# Allegro board st-link-v2_pro_opt.brd
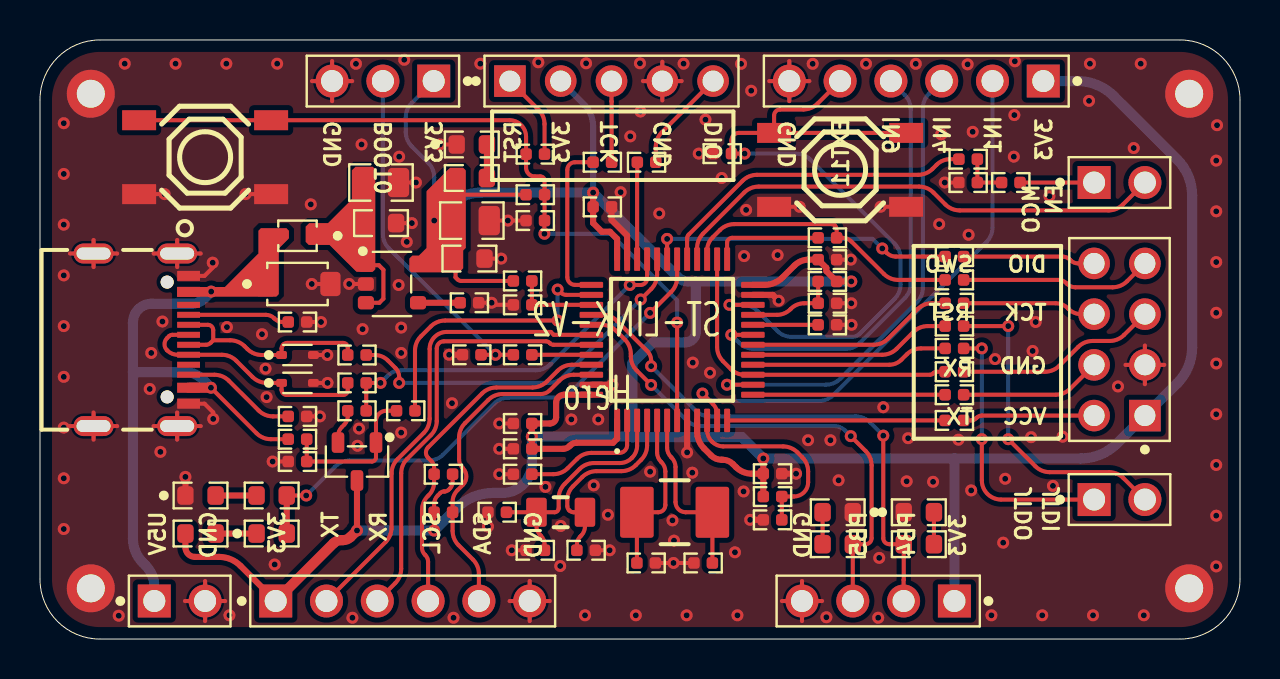
[diagram p0: board, top side]
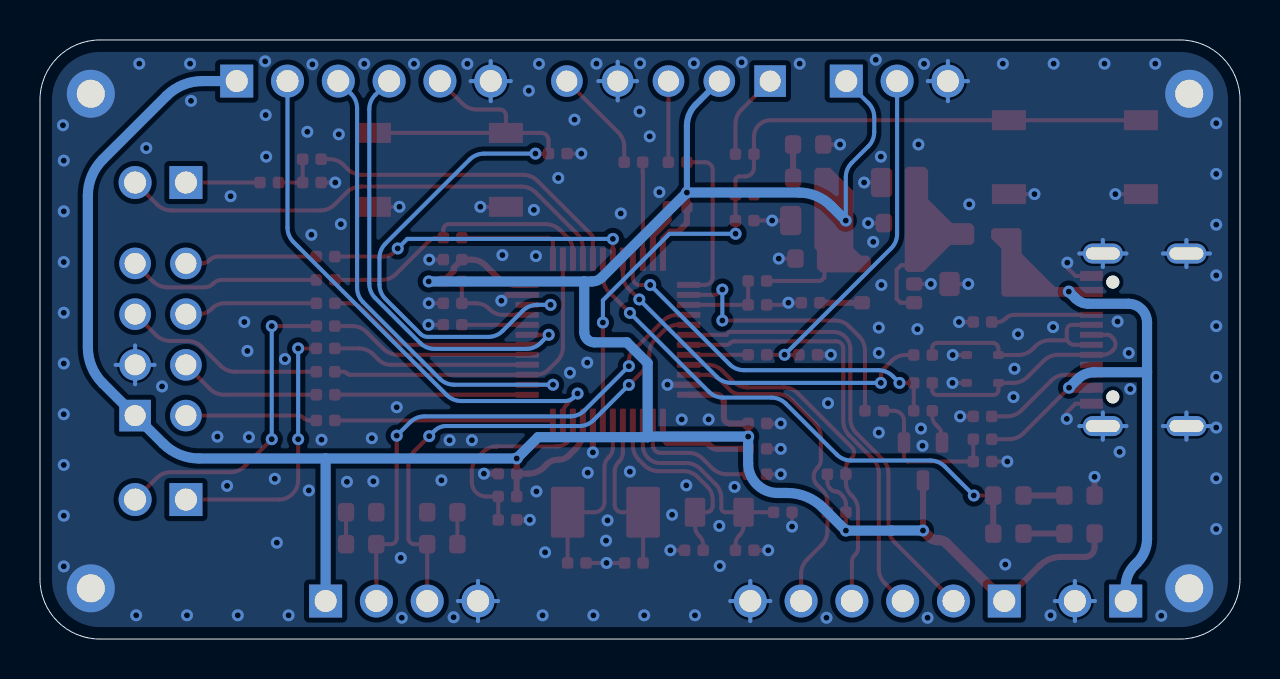
[diagram p1: board, bottom side, seen from below]

Outline 60 x 30 mm; copper layers: TOP, BOTTOM. Coordinates in mm from the lower left corner of the outline.
Outline path: 0,27 0,3 arc(0.88,0.88) 3,0 57,0 arc(59.12,0.88) 60,3 60,27 arc(59.12,29.12) 57,30 3,30 arc(0.88,29.12) 0,27

## Design rules (mm)
constraint set DEFAULT: min track width 0.127

## Placement (name value [footprint] x y rotation side)
C1  20pF,50V  [CAPC100X50X55L25N]  30.31 3.81 180 top
C2  10uF,25V  [CAPC200X125X145L45N]  17.05 22.86 0 top
C3  1uF,25V  [CAPC160X80X90L30N]  17.05 20.83 0 top
C4  10uF,25V  [CAPC200X125X145L45N]  21.59 20.95 0 top
C5  1uF,25V  [CAPC160X80X90L30N]  21.47 19.05 0 top
C6  20pF,50V  [CAPC100X50X55L25N]  33.16 3.81 0 top
C7  1nF,50V(NC)  [CAPC100X50X55L25N]  21.47 16.84 0 top
C8  100nF,25V  [CAPC100X50X55L25N]  24.77 20.95 180 top
C9  20pF,50V  [CAPC100X50X55L25N]  24.77 4.45 0 top
C10  20pF,50V  [CAPC100X50X55L25N]  27.3 4.45 180 top
C11  20pF,50V  [CAPC100X50X55L25N]  46.41 22.86 0 top
C12  100nF,25V  [CAPC100X50X55L25N]  39.37 19 0 top
C13  100nF,25V  [CAPC100X50X55L25N]  36.63 8.28 0 top
C14  100nF,25V  [CAPC100X50X55L25N]  24.13 9.53 180 top
C15  100nF,25V  [CAPC100X50X55L25N]  24.13 10.79 180 top
C16  100nF,25V  [CAPC100X50X55L25N]  28.12 21.64 0 top
C17  100nF,25V  [CAPC100X50X55L25N]  34.11 24.31 180 top
D1  1N4007WS  [SOD265X130X110L32X32N]  12.87 20.19 180 top
D2  SMF5.0A  [SODFL370X180X135L60_50X100N]  12.87 17.78 0 top
D3  TVSS5VCES-02GP-J  [SODFL160X80X70L20X30N]  12.87 14.22 0 top
D4  TVSS5VCES-02GP-J  [SODFL160X80X70L20X30N]  12.87 12.83 0 top
D5  Red_LED  [LEDC160X80X70L30N]  21.59 24.77 0 top
D6  Red_LED  [LEDC160X80X70L30N]  43.94 6.35 0 top
D7  Green_LED  [LEDC160X80X70L30N]  39.89 6.35 180 top
D8  Red_LED  [LEDC160X80X70L30N]  8.03 7.19 0 top
D9  Green_LED  [LEDC160X80X70L30N]  8.03 5.28 180 top
J1  TYPE-C-16P  [USB-C-SMD-16P]  6.86 14.98 270 top
J2  4x2.54P  [HEADER_3X1_2P54]  19.68 27.94 180 top
J3  2x2.54P  [HEADER_2X1_2P54]  5.71 1.91 0 top
J4  5x2.54P  [HDRV5W64P254_5X1_1270X254H860]  23.5 27.94 0 top
J5  6x2.54P  [HEADER_6X1_2P54]  11.79 1.91 0 top
J6  4x2.54P  [HEADER_4X1_2P54]  45.72 1.91 180 top
J7  6x2.54P  [HEADER_6X1_2P54]  50.16 27.94 180 top
J8  P2.54x4x2  [HDRV8W64P254_4X2_1016X502H838]  55.24 11.19 90 top
J9  2x2.54P  [HEADER_2X1_2P54]  52.7 6.99 0 top
J10  2x2.54P  [HEADER_2X1_2P54]  52.7 22.86 0 top
Q1  SS8050  [SOT23-3P95_240X110L53X44N]  15.85 8.89 180 top
R1  100k,5%  [RESC100X50X40L25N]  24.13 14.23 0 top
R2  100k,5%  [RESC100X50X40L25N]  24.77 22.25 0 top
R3  0R,5%  [RESC100X50X40L25N]  39.37 15.74 180 top
R4  5.1k,5%  [RESC100X50X40L25N]  12.87 15.88 180 top
R5  5.1k,5%  [RESC100X50X40L25N]  12.87 11.15 180 top
R6  1k,5%  [RESC160X80X55L30N]  21.59 23.09 0 top
R7  10k,5%  [RESC100X50X40L25N]  12.87 10.01 0 top
R8  0R,5%  [RESC100X50X40L25N]  15.85 14.22 0 top
R9  100R,5%  [RESC100X50X40L25N]  18.29 11.43 0 top
R10  10k,5%(NC)  [RESC100X50X40L25N]  22.86 6.35 0 top
R11  0R,5%  [RESC100X50X40L25N]  15.85 12.83 0 top
R12  36k,5%  [RESC100X50X40L25N]  12.87 8.89 180 top
R13  10k,5%  [RESC100X50X40L25N]  24.13 8.26 0 top
R14  1.5k,5%  [RESC100X50X40L25N]  15.85 11.43 180 top
R15  100R,5%  [RESC100X50X40L25N]  46.41 24.03 0 top
R16  0R,5%  [RESC100X50X40L25N]  48.54 22.86 0 top
R17  0R,5%  [RESC100X50X40L25N]  24.77 24.28 180 top
R18  0R,5%  [RESC100X50X40L25N]  28.12 23.88 180 top
R19  0R,5%  [RESC100X50X40L25N]  30.33 23.88 180 top
R20  100R,5%  [RESC100X50X40L25N]  39.37 20.09 0 top
R21  4.7k,5%  [RESC100X50X40L25N]  36.63 7.14 0 top
R22  4.7k,5%  [RESC100X50X40L25N]  24.13 17.93 0 top
R23  0R,5%(NC)  [RESC100X50X40L25N]  39.37 17.91 180 top
R24  4.7k,5%  [RESC100X50X40L25N]  36.63 5.97 180 top
R25  4.7k,5%(NC)  [RESC100X50X40L25N]  24.13 16.74 180 top
R26  0R,5%(NC)  [RESC100X50X40L25N]  39.37 16.81 0 top
R27  1k,5%  [RESC160X80X55L30N]  43.94 4.75 0 top
R28  1k,5%  [RESC160X80X55L30N]  39.89 4.75 180 top
R30  1k,5%  [RESC160X80X55L30N]  11.58 7.19 180 top
R31  0R,5%  [RESC100X50X40L25N]  45.72 17.98 180 top
R32  0R,5%  [RESC100X50X40L25N]  45.72 19.15 0 top
R33  0R,5%  [RESC100X50X40L25N]  45.72 16.81 0 top
R34  0R,5%  [RESC100X50X40L25N]  45.72 13.39 180 top
R35  0R,5%  [RESC100X50X40L25N]  45.72 14.55 0 top
R36  1k,5%  [RESC160X80X55L30N]  11.58 5.28 180 top
R37  0R,5%  [RESC100X50X40L25N]  45.72 12.23 0 top
R38  0R,5%  [RESC100X50X40L25N]  45.72 15.67 0 top
R39  0R,5%  [RESC100X50X40L25N]  45.72 10.95 0 top
R40  0R,5%  [RESC100X50X40L25N]  21.59 14.23 0 top
R41  4.7k,5%(NC)  [RESC100X50X40L25N]  20.17 8.26 180 top
R42  4.7k,5%(NC)  [RESC100X50X40L25N]  20.17 6.35 0 top
SH1  Screw_Hole_M1.2  [MTGP240H140]  2.54 2.54 0 top
SH2  Screw_Hole_M1.2  [MTGP240H140]  57.46 2.54 0 top
SH3  Screw_Hole_M1.2  [MTGP240H140]  57.46 27.3 0 top
SH4  Screw_Hole_M1.2  [MTGP240H140]  2.54 27.3 0 top
SW1  TS-1187A-B-A-B  [SW_SMD_4P_5D1X5D1]  8.26 24.13 180 top
SW2  TS-1187A-B-A-B  [SW_SMD_4P_5D1X5D1]  40.01 23.5 180 top
U1  RT9013-33GB  [SOT23-5]  17.6 17.78 270 top
U2  STM32F103CBT6  [QFP50P900X900X145-48N]  31.61 14.98 90 top
Y1  8MHz,10pF  [SMD5032-2P]  31.73 6.35 180 top
Y2  32.768kHz,12.5pF  [SMD3215-2P]  26.04 6.35 180 top

## Library data of the parts
C1 C6 C9-C11 = CAP_20pF_50V_NP0_0402
C2 C4 = CAP_10uF_25V_X5R_0805
C3 C5 = CAP_1uF_25V_X7R_0603
C7 = CAP_1nF_50V_X7R_0402
C8 C12-C17 = CAP_100nF_25V_X5R_0402
D1 = DIODE_1N4007WS_50V_1A_SOD-323
D2 = TVS_S_SMF5.0A_5V_SOD-123FL
D3 D4 = ESD_B_TVSS5VCES_5V_SOD-523
D5 D6 D8 = LED_Red_0603
D7 D9 = LED_Green_0603
J1 = HC-TYPE-C-16P-01A-O
J2 = HEADER_3X1_2.54P
J3 J9 J10 = HEADER_2X1_2.54P
J4 = HEADER_5X1_2.54P
J5 J7 = HEADER_6X1_2.54P
J6 = HEADER_4X1_2.54P
J8 = HEADER_V_4X2_2.54P
Q1 = TR_NPN_SS8050_25V_1.5A_SOT-23
R1 R2 = RES_100k_5%_0402
R3 R8 R11 R16-R19 R23 R26 R31-R35 R37-R40 = RES_0R_5%_0402
R4 R5 = RES_5.1k_5%_0402
R6 R27 R28 R30 R36 = RES_1k_5%_0603
R7 R10 R13 = RES_10k_5%_0402
R9 R15 R20 = RES_100R_5%_0402
R12 = RES_36k_5%_0402
R14 = RES_1.5k_5%_0402
R21 R22 R24 R25 R41 R42 = RES_4.7k_5%_0402
SH1-SH4 = Screw_Hole_M1.2
SW1 SW2 = SW_ PUSHBUTTON_4P_2V2: Tolerance: .TOL; User Part Number: .PARTNO
U1 = RT9013-33GB
U2 = STM32F103CBT6
Y1 = 8MHz_20pF_SMD5032-2P
Y2 = 32.768KHz_12.5pF_SMD3215-2P

## Footprints (pads in the part's own frame, mm; a bottom-side part is the same pattern mirrored in y, then rotated)
CAPC100X50X55L25N
  rrect 0.575x0.58 smd: 1(-0.462,0) 2(0.462,0)
CAPC160X80X90L30N
  rrect 0.82x0.929 smd: 1(-0.755,0) 2(0.755,0)
CAPC200X125X145L45N
  rrect 1.065x1.465 smd: 1(-0.875,0) 2(0.875,0)
HDRV5W64P254_5X1_1270X254H860
  rect 1.58x1.58 hole 1.05: 1(0,0)
  round 1.58 hole 1.05: 2(2.54,0) 3(5.08,0) 4(7.62,0) 5(10.16,0)
HDRV8W64P254_4X2_1016X502H838
  rect 1.58x1.58 hole 1.05: 1(0,0)
  round 1.58 hole 1.05: 2(0,2.54) 3(2.54,0) 4(2.54,2.54) 5(5.08,0) 6(5.08,2.54) 7(7.62,0) 8(7.62,2.54)
HEADER_2X1_2P54
  rect 1.65x1.65 hole 1.1: 1(0,0)
  round 1.65 hole 1.1: 2(2.54,0)
HEADER_3X1_2P54
  rect 1.65x1.65 hole 1.1: 1(0,0)
  round 1.65 hole 1.1: 2(2.54,0) 3(5.08,0)
HEADER_4X1_2P54
  rect 1.65x1.65 hole 1.1: 1(0,0)
  round 1.65 hole 1.1: 2(2.54,0) 3(5.08,0) 4(7.62,0)
HEADER_6X1_2P54
  rect 1.65x1.65 hole 1.1: 1(0,0)
  round 1.65 hole 1.1: 2(2.54,0) 3(5.08,0) 4(7.62,0) 5(10.16,0) 6(12.7,0)
LEDC160X80X70L30N
  rrect 0.82x0.929 smd: A(0.755,0) C(-0.755,0)
MTGP240H140
  round 2.4 hole 1.4: 1(0,0)
QFP50P900X900X145-48N
  rrect 1.175x0.3 smd: 1(-4.038,2.75) 2(-4.038,2.25) 3(-4.038,1.75) 4(-4.038,1.25) 5(-4.038,0.75) 6(-4.038,0.25) 7(-4.038,-0.25) 8(-4.038,-0.75) 9(-4.038,-1.25) 10(-4.038,-1.75) 11(-4.038,-2.25) 12(-4.038,-2.75) 25(4.038,-2.75) 26(4.038,-2.25) 27(4.038,-1.75) 28(4.038,-1.25) 29(4.038,-0.75) 30(4.038,-0.25) 31(4.038,0.25) 32(4.038,0.75) 33(4.038,1.25) 34(4.038,1.75) 35(4.038,2.25) 36(4.038,2.75)
  rrect 0.3x1.175 smd: 13(-2.75,-4.038) 14(-2.25,-4.038) 15(-1.75,-4.038) 16(-1.25,-4.038) 17(-0.75,-4.038) 18(-0.25,-4.038) 19(0.25,-4.038) 20(0.75,-4.038) 21(1.25,-4.038) 22(1.75,-4.038) 23(2.25,-4.038) 24(2.75,-4.038) 37(2.75,4.038) 38(2.25,4.038) 39(1.75,4.038) 40(1.25,4.038) 41(0.75,4.038) 42(0.25,4.038) 43(-0.25,4.038) 44(-0.75,4.038) 45(-1.25,4.038) 46(-1.75,4.038) 47(-2.25,4.038) 48(-2.75,4.038)
RESC100X50X40L25N
  rrect 0.575x0.58 smd: 1(-0.462,0) 2(0.462,0)
RESC160X80X55L30N
  rrect 0.82x0.929 smd: 1(-0.755,0) 2(0.755,0)
SMD3215-2P
  rrect 1.025x1.45 smd: 1(-1.213,0) 2(1.213,0)
SMD5032-2P
  rrect 1.675x2.55 smd: 1(-1.887,0) 2(1.887,0)
SOD265X130X110L32X32N
  rrect 1.099x0.557 smd: A(1.09,0) C(-1.09,0)
SODFL160X80X70L20X30N
  rrect 0.538x0.4 smd: A(0.796,0) C(-0.796,0)
SODFL370X180X135L60_50X100N
  rrect 1.015x1.215 smd: A(1.65,0)
  rrect 1.115x1.215 smd: C(-1.6,0)
SOT23-3P95_240X110L53X44N
  rrect 0.629x1.03 smd: 1(-0.95,-0.95) 2(0.95,-0.95) 3(0,0.95)
SOT23-5
  rrect 0.668x0.805 smd: 1(-0.94,-1.304) 2(0,-1.304) 3(0.94,-1.304) 4(0.94,1.304) 5(-0.94,1.304)
SW_SMD_4P_5D1X5D1
  rect 1.7x1 smd: 1(-3.3,1.85) 2(3.3,1.85) 3(-3.3,-1.85) 4(3.3,-1.85)
USB-C-SMD-16P
  round 0.65 hole 0.65 unplated: (-2.89,-0.5) (2.86,-0.5)
  oval 1x2 hole 0.6x1.7: 1(-4.32,0) 2(4.32,0) 3(-4.32,-4.18) 4(4.32,-4.18)
  rect 0.5x1.14 smd: A1B12(-3.2,0.57) A4B9(-2.4,0.57) B1A12(3.2,0.57) B4A9(2.4,0.57)
  rect 0.3x1.14 smd: A5(-1.25,0.57) A6(-0.25,0.57) A7(0.25,0.57) A8(1.25,0.57) B5(1.75,0.57) B6(0.75,0.57) B7(-0.75,0.57) B8(-1.75,0.57)

## Nets
3V3_ST: C4.1 C5.1 C12.1 C13.1 C14.1 C15.1 C16.1 D9.A J2.1 J4.2 J5.1 J6.1 J7.1 J8.1 Q1.3 R2.1 R6.1 R21.1 R22.1 R23.1 R41.1 R42.1 U1.5(VOUT) U2.1 U2.9 U2.24 U2.36 U2.48
GND: C1.1 C2.2 C3.2 C4.2 C5.2 C6.1 C7.2 C8.2 C9.1 C10.1 C11.1 C12.2 C13.2 C14.2 C15.2 C16.2 C17.2 D2.A D3.A D4.A D5.C(CATHODE) D6.C(CATHODE) D7.C(CATHODE) D8.C(CATHODE) J1.1 J1.2 J1.3 J1.4 J1.A1B12 J1.B1A12 J2.3 J3.2 J4.4 J5.6 J6.4 J7.6 J8.3 R3.1 R4.1 R5.1 R10.1 R12.2 R13.1 R24.2 R25.2 R26.2 R40.1 SH1.1(TP) SH2.1(TP) SH3.1(TP) SH4.1(TP) SW1.1 SW1.2 SW2.1 SW2.2 U1.2 U2.8 U2.23 U2.35 U2.47(VSS_3)
ADC1_IN1: J7.2 U2.11
ADC1_IN4: J7.3 U2.14
ADC1_IN9: J7.4 U2.19
AIN_1: R21.2 R24.1 U2.10
EXT11: C17.1 J7.5 SW2.3 SW2.4 U2.22
I2C1_SCL: J5.4 R41.2 U2.45
I2C1_SDA: J5.5 R42.2 U2.46
LED_STLINK: R30.1 R36.1 U2.30
MCO: J10.1 R16.2
OSC32_IN: C9.2 R10.2 U2.3 Y2.2
OSC32_OUT: C10.2 U2.4 Y2.1
OSC_IN: C1.2 U2.5 Y1.2
OSC_OUT: C6.2 U2.6 Y1.1
PA8: R15.1 U2.29
PB4: J6.2 R27.1 U2.40
PB5: J6.3 R28.1 U2.41
PB10: R23.2 R26.1 U2.21
PWR_ENN: J10.2 U2.28
PWR_EXT: R22.2 R25.1 U2.39
ST_BOOT0: R1.2 U2.44
ST_BOOT1: R3.2 U2.20
ST_USB_N: R8.2 U2.32
ST_USB_P: R11.2 R14.1 U2.33
STLINK_RX: R37.1 U2.13
STLINK_TX: R39.1 U2.12
STM_JTCK: R18.2 U2.37
STM_JTMS: R19.2 U2.34
STM_RST: C8.1 R2.2 R17.2 SW1.3 SW1.4 U2.7
T_JRST: R33.1 U2.18
T_JTCK: R34.2 U2.15 U2.26
T_JTDI: R38.1 U2.17
T_JTDO: R35.1 U2.16
T_JTMS: R20.2 R31.2 U2.27
T_SWDIO_IN: R20.1 U2.25
T_SWO: R32.1 U2.31
U5V: D1.A D2.C(CATHODE) J1.A4B9 J1.B4A9(VBUS#B4A9) J3.1 R7.1
USART1_RX: J5.3 U2.43
USART1_TX: J5.2 U2.42
USB_N: D3.C J1.A7 J1.B7 R8.1
USB_P: D4.C J1.A6 J1.B6 R11.1
USB_RENUMN: R9.2 U2.38
N01383: Q1.2(E) R14.2
N01643: Q1.1 R7.2 R9.1 R12.1
N02559: C2.1 C3.1 D1.C U1.1 U1.3
N02991: C7.1 U1.4
N15750: C11.2 R15.2 R16.1
N18913: D8.A R30.2
N18917: D9.C(CATHODE) R36.2
N43468: J8.8 R32.2
N43472: J8.6 R33.2
N43480: J8.2 R39.2
N43828: J8.4 R37.2
N44493: J4.5 R19.1
N44516: J4.3 R18.1
N44659: J9.1 R35.2
N44671: J9.2 R38.2
N60144: J8.5 R34.1
N60172: J8.7 R31.1
N62729: J1.A5 R4.2
N62849: J1.B5 R5.2
N105457: J4.1 R17.1
N112115: R13.2 U2.2
N115138: J2.2 R1.1 R40.2
N116586: D5.A R6.2
N120825: D6.A R27.2
N121032: D7.A R28.2

Pads without a net: J1 A8 B8

## Via types
v1: diameter 0.6, hole 0.3, TOP to BOTTOM, 199 vias

## Routing (per net, layer and track width the routed paths; a pad name or vN(x,y) marks a point on that pad's centre or on a via; arc(x,y) is an arc through that point)
3V3_ST: length 175.8
  TOP w0.203: R22.1 21.06,17.93 arc(20.96,17.95) 20.88,18.01 20.78,18.11 20.78,18.99 C5.1 ; v1(19.71,5.43) R42.1 19.71,6.75 arc(19.75,6.99) 19.88,7.18 20.02,7.32 arc(20.1,7.37) 20.2,7.39 20.24,7.39 arc(20.34,7.41) 20.42,7.47 20.5,7.55 arc(20.6,7.69) 20.63,7.86 R41.1 ; R2.1 20.24,22.25 19.71,21.72 v1(19.71,20.95)
  TOP w0.305: v1(15.85,5.44) Q1.3 ; v1(27.66,22.36) C16.1 27.66,20.83 28.09,20.4 28.5,20.4 28.86,20.04 U2.36 ; U2.9 32.86,10.39 arc(32.95,9.93) 33.21,9.54 33.56,9.19 arc(33.79,9.03) 34.07,8.98 34.13,8.98 arc(34.41,8.92) 34.64,8.77 34.8,8.61 arc(35.16,8.37) 35.59,8.28 C13.1 ; v1(40.56,17.91) R23.1 39.83,17.91 39.32,18.43 39.32,18.59 38.91,19 C12.1 38.43,19 arc(38.05,18.92) 37.73,18.71 37.13,18.11 arc(36.71,17.83) 36.23,17.74 U2.24 ; U2.48 26.2,12.23 arc(25.92,12.12) 25.81,11.84 25.81,11.1 arc(25.72,10.88) 25.5,10.79 C15.1 v1(24.59,10.14) C14.1 26.15,9.53 arc(26.33,9.56) 26.47,9.66 26.51,9.7 arc(26.66,9.8) 26.83,9.83 28.65,9.83 28.86,10.03 U2.1 ; J5.1 10.02,3.67 arc(9.53,4) 8.94,4.11 7.75,4.11 arc(7.41,4.25) 7.27,4.59 D9.A ; R21.1 C13.1 ; C13.1 v1(36.16,9.04)
  TOP w0.508: C4.1 v1(19.71,20.95) ; J5.1 14.68,4.8 arc(14.85,4.91) 15.05,4.95 15.15,4.95 arc(15.35,4.99) 15.52,5.11 v1(15.85,5.44)
  BOTTOM w0.203: J2.1 18.59,26.84 arc(18.37,26.51) 18.29,26.12 18.29,25.39 arc(18.37,25) 18.59,24.67 19.41,23.84 arc(19.63,23.51) 19.71,23.13 v1(19.71,20.95)
  BOTTOM w0.305: J4.2 27.21,26.77 arc(27.54,26.27) 27.66,25.69 v1(27.66,22.36)
  BOTTOM w0.508: 45.72,9.04 52.05,9.04 arc(53.02,9.24) 53.84,9.79 J8.1 56.86,12.81 arc(57.41,13.63) 57.61,14.6 57.61,22.21 arc(57.41,23.19) 56.86,24.01 53.68,27.2 arc(52.85,27.75) 51.88,27.94 J7.1 ; 45.72,9.04 v1(36.16,9.04) 35.1,10.11 29.62,10.11 ; 45.72,9.04 J6.1 ; 29.62,10.11 29.59,10.14 v1(24.59,10.14) 24.59,8.79 arc(24.16,7.75) 23.11,7.32 22.64,7.32 arc(21.67,7.12) 20.85,6.57 v1(19.71,5.43) 17.43,5.43 17.42,5.44 v1(15.85,5.44) ; 29.62,10.11 29.62,13.82 30.66,14.86 32.28,14.86 arc(32.64,15.01) 32.79,15.37 32.79,17.91 ; 32.79,17.91 32.4,17.91 arc(32.13,17.96) 31.9,18.11 v1(27.66,22.36) 22.05,22.36 arc(21.18,22.18) 20.45,21.69 v1(19.71,20.95) ; 32.79,17.91 v1(40.56,17.91)
GND: length 125.9
  TOP w0.203: C15.2 v1(22.96,10.79) ; 38.1,0.9 38.1,1.91 ; 38.1,1.91 39.1,1.91 ; 38.1,1.91 38.1,2.91 ; 38.1,1.91 37.1,1.91 ; 2.68,18.63 J1.3 ; J1.3 3.86,19.31 ; J1.3 1.5,19.31 ; J1.3 2.68,19.98 ; 2.68,9.99 J1.4 ; J1.4 1.5,10.66 ; J1.4 2.68,11.34 ; J1.4 3.86,10.66 ; R12.2 v1(11.63,8.89) ; J1.2 6.86,11.34 ; J1.2 5.68,10.66 ; J1.2 8.04,10.66 ; J1.2 6.86,9.99 ; 24.49,0.9 J5.6 ; J5.6 23.48,1.91 ; J5.6 24.49,2.91 ; J5.6 25.49,1.91 ; SW2.2 v1(37.98,21.64) ; v1(8.66,11.02) 8.66,11.35 8.23,11.79 J1.B1A12 ; C6.1 v1(31.67,3.81) C1.1 ; J1.1 6.86,19.98 ; J1.1 6.86,18.63 ; J1.1 8.04,19.31 ; J1.1 5.68,19.31 ; 8.26,1.91 9.26,1.91 ; 8.26,1.91 7.25,1.91 ; 8.26,1.91 8.26,2.91 ; 8.26,1.91 8.26,0.9 ; J1.A1B12 8.23,18.18 8.64,18.59 v1(8.64,18.85) ; C14.2 v1(22.96,9.53) ; SW2.1 v1(42.03,21.64) ; C10.1 v1(28.48,4.45) ; R26.2 v1(40.56,16.81) ; R25.2 22.69,16.74 v1(22.58,16.84) C7.2 ; 13.6,27.94 J2.3 ; J2.3 14.61,28.94 ; J2.3 15.61,27.94 ; J2.3 14.61,26.94 ; 37.47,26.94 J7.6 ; J7.6 37.47,28.94 ; J7.6 38.47,27.94 ; J7.6 36.46,27.94 ; R10.1 v1(22.4,5.63) ; C2.2 v1(18.8,22.86) ; C4.2 v1(23.39,20.95) C8.2 ; D4.A v1(14.38,12.83) ; 54.28,13.73 J8.3 ; J8.3 55.24,12.76 ; J8.3 56.21,13.73 ; J8.3 55.24,14.7 ; C5.2 v1(23.06,19.05) ; U1.2 v1(15.46,17.78) ; D2.A v1(13.59,17.78) ; C12.2 v1(40.54,19) ; C17.2 v1(32.94,24.31) ; J4.4 31.11,28.91 ; J4.4 30.15,27.94 ; J4.4 32.08,27.94 ; J4.4 31.11,26.97 ; R13.1 v1(22.96,8.26) ; R5.1 v1(13.99,11.15) ; C11.1 v1(45.24,22.86) ; R3.1 v1(40.58,15.74) ; R4.1 v1(14.05,15.88) ; SW1.2 v1(6.23,22.28) ; D5.C v1(20,24.77) ; D3.A v1(14.37,14.22) ; C9.1 v1(23.59,4.45) ; SW1.1 v1(10.28,22.28) ; C3.2 v1(18.59,20.83)
  TOP w0.305: U2.8 v1(32.36,9.35) ; U2.23 36.64,17.23 v1(36.93,16.94) ; D8.C v1(7.27,8.12) ; C16.2 28.58,20.98 29.36,20.2 U2.35 ; R24.2 v1(35.51,5.97) ; R40.1 v1(20.46,14.23) ; C13.2 v1(37.8,8.28) ; U2.47 v1(28.63,12.74)
  BOTTOM w0.203: 7.25,1.91 8.26,1.91 ; 8.26,1.91 8.26,0.9 ; 8.26,1.91 8.26,2.91 ; 8.26,1.91 9.26,1.91 ; J2.3 15.61,27.94 ; J2.3 14.61,26.94 ; J2.3 13.6,27.94 ; J2.3 14.61,28.94 ; 38.1,1.91 39.1,1.91 ; 38.1,1.91 37.1,1.91 ; 38.1,1.91 38.1,2.91 ; 38.1,1.91 38.1,0.9 ; 5.68,19.31 J1.1 ; J1.1 8.04,19.31 ; J1.1 6.86,18.63 ; J1.1 6.86,19.98 ; J5.6 24.49,2.91 ; J5.6 25.49,1.91 ; J5.6 24.49,0.9 ; J5.6 23.48,1.91 ; J7.6 37.47,28.94 ; J7.6 37.47,26.94 ; J7.6 38.47,27.94 ; J7.6 36.46,27.94 ; J1.3 2.68,19.98 ; J1.3 3.86,19.31 ; J1.3 1.5,19.31 ; J1.3 2.68,18.63 ; J4.4 31.11,28.91 ; J4.4 30.15,27.94 ; J4.4 32.08,27.94 ; J4.4 31.11,26.97 ; J1.4 3.86,10.66 ; J1.4 1.5,10.66 ; J1.4 2.68,9.99 ; J1.4 2.68,11.34 ; J1.2 6.86,11.34 ; J1.2 5.68,10.66 ; J1.2 6.86,9.99 ; J1.2 8.04,10.66 ; 55.24,12.76 J8.3 ; J8.3 54.28,13.73 ; J8.3 56.21,13.73 ; J8.3 55.24,14.7
  vias: v1(1.19,25.83) v1(1.19,23.29) v1(1.19,20.75) v1(1.19,18.21) v1(1.19,15.67) v1(1.19,13.13) v1(1.19,10.59) v1(1.19,8.05) v1(1.19,5.51) v1(3.94,1.17) v1(4.24,28.81) v1(5.49,12.52) v1(5.56,14.33) v1(6.02,9.37) v1(6.12,15.9) v1(6.78,28.81) v1(9.32,28.81) v1(9.35,15.62) v1(9.47,1.19) v1(11.1,15.27) v1(11.28,13.54) v1(11.33,12.12) v1(11.73,3.73) v1(11.86,28.81) v1(13.54,21.77) v1(15.62,1.07) v1(15.8,28.8) v1(15.88,9.68) v1(15.95,10.54) v1(16.08,24.77) v1(16.13,15.52) v1(17.93,17.73) v1(17.96,24.16) v1(18.06,15.6) v1(18.06,14.33) v1(18.06,10.34) v1(18.21,29.01) v1(18.34,19.89) v1(20.6,11.81) v1(20.68,1.07) v1(22.02,28.81) v1(24.92,28.88) v1(25.27,7.62) v1(26.04,5.66) v1(26.01,3.66) v1(26.57,11) v1(27.3,28.83) v1(27.25,1.19) v1(27.69,7.7) v1(27.91,11) v1(28.4,6.22) v1(29.03,22.38) v1(29.51,25.17) v1(29.79,1.19) v1(30,28.83) v1(30.02,26.42) v1(30.51,8.38) v1(30.96,21.31) v1(31.62,5.94) v1(31.7,4.93) v1(32.18,28.81) v1(32.33,1.19) v1(32.64,13.84) v1(32.61,8.33) v1(33.27,26.01) v1(33.5,13.34) v1(34.09,23.09) v1(34.75,4.34) v1(34.87,1.19) v1(35.05,28.8) v1(35.2,19.18) v1(35.18,7.39) v1(35.31,21.49) v1(35.56,27.46) v1(36.88,19.23) v1(38.4,9.96) v1(38.63,28.8) v1(39.32,1.09) v1(39.52,9.96) v1(39.93,7.95) v1(41.3,28.8) v1(41.91,1.07) v1(41.96,4.06) v1(42.16,11.61) v1(43.33,7.9) v1(43.41,10.06) v1(43.79,28.8) v1(44.65,7.87) v1(44.96,20.78) v1(45.06,25.27) v1(45.92,9.98) v1(46.38,28.78) v1(46.43,20.24) v1(46.63,25.4) v1(46.56,7.44) v1(47.57,1.19) v1(47.75,14.02) v1(48.16,4.83) v1(48.26,8.03) v1(48.74,28.93) v1(48.72,26.24) v1(48.69,24.16) v1(49.63,14.43) v1(49.56,10.11) v1(49.78,15.88) v1(50.11,1.19) v1(50.47,22.17) v1(50.65,7.67) v1(51.13,10.13) v1(52.5,28.81) v1(52.45,26.95) v1(52.65,1.19) v1(53.9,12.65) v1(54.69,24.59) v1(55.04,28.81) v1(55.19,1.19) v1(58.81,23.96) v1(58.81,21.42) v1(58.81,18.88) v1(58.81,16.34) v1(58.81,13.8) v1(58.81,11.26) v1(58.81,8.72) v1(58.81,6.18) v1(58.81,3.64) v1(58.85,25.73)
ADC1_IN1: length 27.3
  TOP w0.203: U2.11 33.86,11.27 arc(33.8,11.54) 33.65,11.76 v1(33.12,12.29)
  BOTTOM w0.203: v1(33.12,12.29) 33.32,12.09 arc(33.51,11.96) 33.74,11.92 38.94,11.92 arc(39.33,12) 39.66,12.22 47.33,19.89 arc(47.55,20.22) 47.62,20.6 J7.2
ADC1_IN4: length 24
  TOP w0.203: U2.14 v1(34.35,12.74)
  BOTTOM w0.203: J7.3 44.44,27.3 arc(44.22,26.97) 44.15,26.58 44.15,17.59 arc(44.07,17.2) 43.85,16.87 40.01,13.03 arc(39.68,12.81) 39.29,12.74 v1(34.35,12.74)
ADC1_IN9: length 22.3
  TOP w0.203: U2.19 v1(34.56,15.23)
  BOTTOM w0.203: J7.4 43.24,27.25 arc(43.46,26.92) 43.54,26.53 43.54,17.79 arc(43.46,17.4) 43.24,17.07 40.99,14.83 arc(40.66,14.61) 40.27,14.53 35.69,14.53 arc(35.3,14.61) 34.97,14.83 v1(34.56,15.23)
AIN_1: length 10.1
  TOP w0.203: R24.1 R21.2 37.69,7.14 arc(38.2,7.35) 38.41,7.85 38.41,8.39 arc(38.33,8.78) 38.11,9.11 37.87,9.35 arc(37.54,9.57) 37.15,9.65 34.16,9.65 arc(33.86,9.71) 33.61,9.88 33.58,9.9 arc(33.41,10.16) 33.36,10.45 U2.10
EXT11: length 38.2
  TOP w0.203: v1(35.23,24.31) C17.1 34.57,24.98 arc(34.68,25.24) 34.94,25.35 SW2.4 ; J7.5 38.88,26.82 arc(38.55,26.59) 38.16,26.52 37.01,26.52 arc(36.79,26.43) 36.71,26.21 SW2.4 ; SW2.4 SW2.3 ; U2.22 v1(34.47,16.74)
  BOTTOM w0.203: v1(34.47,16.74) 35.14,16.74 arc(35.53,16.66) 35.86,16.44 36.87,15.43 arc(37.2,15.21) 37.59,15.13 40.61,15.13 arc(40.81,15.17) 40.98,15.29 42.73,17.03 arc(42.95,17.36) 43.03,17.75 43.03,19.08 arc(42.95,19.47) 42.73,19.8 38.52,24.01 arc(38.19,24.23) 37.8,24.31 v1(35.23,24.31)
I2C1_SCL: length 17.9
  TOP w0.203: J5.4 19.41,3.87 arc(19.37,4.05) 19.27,4.2 19.24,4.23 arc(19.14,4.38) 19.1,4.56 19.1,6.46 arc(19.18,6.84) 19.39,7.16 19.44,7.21 arc(19.64,7.5) 19.71,7.84 R41.2 19.71,8.58 arc(19.67,8.76) 19.57,8.91 19.41,9.07 arc(19.3,9.34) 19.41,9.6 22.11,12.3 arc(22.43,12.52) 22.82,12.6 24.62,12.6 arc(25.01,12.68) 25.34,12.9 25.88,13.44 arc(26.21,13.66) 26.6,13.74 U2.45
I2C1_SDA: length 17
  TOP w0.203: U2.46 26.69,13.23 arc(26.3,13.16) 25.97,12.94 25.48,12.45 arc(25.28,12.31) 25.05,12.27 23.13,12.27 arc(22.74,12.19) 22.41,11.97 21.25,10.81 arc(21.03,10.48) 20.95,10.09 20.95,9 arc(21,8.77) 21.13,8.57 21.15,8.56 arc(21.32,8.14) 21.15,7.72 20.87,7.45 arc(20.69,7.18) 20.63,6.86 R42.2 20.63,5.42 arc(20.71,5.03) 20.93,4.7 21.65,3.98 arc(21.87,3.65) 21.95,3.26 J5.5
LED_STLINK: length 26.9
  TOP w0.203: U2.30 31.86,18.1 arc(31.78,17.71) 31.56,17.38 v1(30.51,16.33) ; R30.1 v1(13.31,7.19)
  TOP w0.305: R36.1 R30.1
  BOTTOM w0.203: v1(30.51,16.33) 26.56,12.39 arc(26.23,12.17) 25.84,12.09 23.43,12.09 arc(23.04,12.01) 22.71,11.79 20.16,9.24 arc(19.83,9.02) 19.44,8.94 15.48,8.94 arc(15.09,8.86) 14.76,8.64 v1(13.31,7.19)
MCO: length 3.7
  TOP w0.203: R16.2 J10.1
OSC32_IN: length 11.8
  TOP w0.203: Y2.2 24.82,5.66 arc(24.87,5.42) 25.01,5.21 25.05,5.17 arc(25.18,4.97) 25.23,4.74 C9.2 ; Y2.2 R10.2 ; Y2.2 25.73,6.35 arc(25.87,6.41) 25.93,6.55 25.93,7.05 arc(26.01,7.44) 26.23,7.77 26.98,8.52 arc(27.31,8.74) 27.7,8.81 28.99,8.81 arc(29.31,8.88) 29.58,9.06 29.61,9.09 arc(29.79,9.36) 29.86,9.68 U2.3
OSC32_OUT: length 10.1
  TOP w0.203: U2.4 30.36,9.69 arc(30.28,9.31) 30.06,8.98 29.79,8.71 arc(29.46,8.48) 29.07,8.41 27.83,8.41 arc(27.44,8.33) 27.11,8.11 26.64,7.64 arc(26.44,7.34) 26.37,6.97 26.37,6.66 arc(26.39,6.55) 26.45,6.46 26.48,6.43 arc(26.57,6.37) 26.67,6.35 Y2.1 27.25,5.63 arc(27.2,5.39) 27.06,5.18 27.01,5.13 arc(26.89,4.95) 26.84,4.72 C10.2
OSC_IN: length 8.5
  TOP w0.203: U2.5 30.86,9.34 arc(30.91,9.09) 31.05,8.88 31.08,8.85 arc(31.22,8.64) 31.27,8.39 31.27,6.71 arc(31.16,6.45) 30.91,6.35 Y1.2 C1.2
OSC_OUT: length 8.9
  TOP w0.203: U2.6 31.36,9.59 arc(31.41,9.33) 31.55,9.11 31.58,9.09 arc(31.72,8.87) 31.78,8.61 31.78,6.86 arc(31.92,6.5) 32.28,6.35 Y1.1 C6.2
PA8: length 16.2
  TOP w0.203: U2.29 32.36,19.91 32.36,20.06 arc(32.38,20.17) 32.43,20.25 35.13,22.95 arc(35.46,23.17) 35.85,23.25 43.91,23.25 arc(44.3,23.32) 44.63,23.54 44.83,23.75 arc(45.14,23.96) 45.51,24.03 R15.1
PB4: length 26.4
  TOP w0.203: U2.40 28.12,16.23 arc(28.51,16.16) 28.84,15.94 30.37,14.41 arc(30.51,14.2) 30.56,13.96 v1(30.56,13.67) ; v1(42.16,10.19) 42.16,5.05 arc(42.25,4.84) 42.47,4.75 R27.1 43.19,2.97 43.18,2.96 43.18,1.91
  BOTTOM w0.203: v1(30.56,13.67) 32.77,11.45 arc(33.1,11.23) 33.49,11.15 40.78,11.15 arc(41.17,11.07) 41.5,10.85 v1(42.16,10.19)
PB5: length 25.1
  TOP w0.203: v1(40.54,10.16) 41.28,9.42 arc(41.5,9.09) 41.58,8.7 41.58,5.05 arc(41.49,4.84) 41.28,4.75 R28.1 40.64,1.91 ; U2.41 28.09,15.74 arc(28.48,15.66) 28.8,15.44 29.24,15 arc(29.46,14.67) 29.54,14.28 29.54,14.16 arc(29.62,13.77) 29.84,13.44 v1(30.56,12.73)
  BOTTOM w0.203: v1(40.54,10.16) 40.27,10.43 arc(40,10.61) 39.69,10.67 33.03,10.67 arc(32.65,10.75) 32.32,10.97 v1(30.56,12.73)
PB10: length 4.5
  TOP w0.203: U2.21 36.85,16.23 arc(37.21,16.31) 37.52,16.51 37.55,16.54 arc(37.85,16.74) 38.21,16.81 R26.1 R23.2
PWR_ENN: length 25.3
  TOP w0.203: J10.2 54.15,21.76 arc(53.82,21.54) 53.43,21.46 45.99,21.46 arc(45.6,21.54) 45.27,21.76 44.67,22.36 arc(44.34,22.58) 43.95,22.66 35.93,22.66 arc(35.54,22.58) 35.21,22.36 33.15,20.3 arc(32.93,19.97) 32.86,19.58 U2.28
PWR_EXT: length 4.2
  TOP w0.203: R22.2 R25.1 U2.39
ST_BOOT0: length 3
  TOP w0.203: U2.44 R1.2
ST_BOOT1: length 3.3
  TOP w0.203: U2.20 R3.2
ST_USB_N: length 18.6
  TOP w0.203: v1(17.96,12.83) 17.96,13.13 arc(17.91,13.37) 17.77,13.57 17.39,13.95 arc(17.09,14.15) 16.74,14.22 R8.2 ; U2.32 30.86,18.25 arc(30.78,17.86) 30.56,17.53 v1(30.04,17.01)
  BOTTOM w0.203: v1(30.04,17.01) 26.15,13.12 arc(25.83,12.9) 25.44,12.83 v1(17.96,12.83)
ST_USB_P: length 18.5
  TOP w0.203: v1(17.03,12.83) R11.2 R14.1 ; U2.33 30.36,18.07 arc(30.26,17.83) 30.02,17.73 v1(29.49,17.73)
  BOTTOM w0.203: v1(29.49,17.73) 25.52,13.76 arc(25.19,13.54) 24.8,13.46 18.08,13.46 arc(17.69,13.38) 17.36,13.16 v1(17.03,12.83)
STLINK_RX: length 9.6
  TOP w0.203: U2.13 R37.1
STLINK_TX: length 10.9
  TOP w0.203: U2.12 R39.1
STM_JTCK: length 8.3
  TOP w0.203: U2.37 26.75,17.74 arc(26.48,17.85) 26.37,18.12 26.37,23.5 arc(26.48,23.76) 26.75,23.88 R18.2
STM_JTMS: length 4.9
  TOP w0.203: U2.34 29.86,23.35 29.87,23.36 R19.2
STM_RST: length 39.4
  TOP w0.203: v1(25.22,20.29) 25.22,20.95 C8.1 R2.2 25.23,22.96 arc(25.17,23.1) 25.02,23.16 24.74,23.16 arc(24.43,23.29) 24.3,23.6 R17.2 24.3,25.15 arc(24.06,25.74) 23.47,25.98 SW1.3 SW1.4 ; U2.7 v1(31.86,15.85)
  BOTTOM w0.203: v1(31.86,15.85) 31.86,16.96 28.52,20.29 v1(25.22,20.29)
T_JRST: length 10.4
  TOP w0.203: U2.18 41.67,14.74 arc(42.06,14.81) 42.39,15.03 43.87,16.52 arc(44.2,16.74) 44.59,16.81 R33.1
T_JTCK: length 16.6
  TOP w0.203: R34.2 44.83,13.39 arc(44.75,13.37) 44.68,13.32 44.65,13.3 arc(44.58,13.25) 44.5,13.23 U2.15 35.21,13.23 arc(34.86,13.31) 34.55,13.51 34.15,13.91 arc(33.93,14.24) 33.86,14.63 U2.26
T_JTDI: length 10.1
  TOP w0.203: U2.17 42.11,14.23 arc(42.5,14.31) 42.83,14.53 43.67,15.37 arc(44,15.59) 44.39,15.67 R38.1
T_JTDO: length 9.9
  TOP w0.203: R35.1 44.06,14.55 arc(43.67,14.48) 43.34,14.26 43.07,13.99 arc(42.79,13.8) 42.46,13.74 U2.16
T_JTMS: length 14.4
  TOP w0.203: U2.27 33.36,19.45 arc(33.43,19.81) 33.63,20.11 34,20.48 arc(34.33,20.7) 34.71,20.78 39.57,20.78 arc(39.66,20.76) 39.73,20.71 39.76,20.68 arc(39.81,20.6) 39.83,20.51 R20.2 40.13,20.09 arc(40.37,20.04) 40.57,19.91 42.2,18.28 arc(42.53,18.06) 42.92,17.98 R31.2
T_SWDIO_IN: length 5.5
  TOP w0.203: U2.25 34.36,19.84 arc(34.43,20.02) 34.61,20.09 R20.1
T_SWO: length 15.3
  TOP w0.203: v1(42.11,19.56) 42.33,19.34 arc(42.54,19.2) 42.79,19.15 R32.1 ; U2.31 v1(31.36,20.04)
  BOTTOM w0.203: v1(31.36,20.04) 41.63,20.04 v1(42.11,19.56)
U5V: length 29.1
  TOP w0.203: R7.1 11.55,10.01 arc(11.16,10.08) 10.83,10.31 v1(8.55,12.58)
  TOP w0.508: J1.B4A9 v1(8.55,12.58)
  BOTTOM w0.508: J3.1 5.71,2.63 arc(5.6,3.2) 5.27,3.69 5.15,3.82 arc(4.78,4.37) 4.65,5.02 4.65,13.36 ; 4.65,13.36 4.65,15.85 arc(4.92,16.51) 5.59,16.79 7.57,16.79 arc(7.92,16.86) 8.22,17.06 v1(8.56,17.4) ; 4.65,13.36 7.27,13.36 arc(7.73,13.27) 8.12,13.01 v1(8.55,12.58)
USART1_RX: length 21.7
  TOP w0.203: J5.3 17.76,2.8 arc(17.98,3.13) 18.06,3.52 18.06,8.3 arc(18.14,8.69) 18.36,9.02 19.54,10.2 arc(19.76,10.53) 19.84,10.92 19.84,14.55 arc(19.94,14.81) 20.19,14.91 25.3,14.91 arc(25.39,14.89) 25.47,14.84 25.5,14.81 arc(25.58,14.75) 25.68,14.74 U2.43
USART1_TX: length 23.3
  TOP w0.203: U2.42 25.68,15.23 25.54,15.38 20.34,15.38 arc(19.73,15.13) 19.48,14.53 19.48,11.03 arc(19.4,10.64) 19.18,10.31 17.87,9 arc(17.65,8.67) 17.58,8.29 17.58,5.58 arc(17.5,5.19) 17.28,4.86 J5.2
USB_N: length 11.1
  TOP w0.203: J1.B7 8.39,15.74 arc(8.58,15.66) 8.66,15.47 8.66,14.96 ; J1.A7 8.3,14.74 arc(8.43,14.76) 8.53,14.83 8.66,14.96 ; R8.1 15.39,14.6 arc(15.32,14.76) 15.15,14.83 12.36,14.83 arc(12.26,14.81) 12.18,14.76 12.15,14.73 arc(12.1,14.64) 12.08,14.55 D3.C 11.09,14.22 arc(10.7,14.3) 10.37,14.52 10.23,14.66 arc(9.9,14.88) 9.51,14.96 8.66,14.96
USB_P: length 12.4
  TOP w0.203: J1.A6 6.62,15.23 arc(6.53,15.22) 6.45,15.16 6.35,15.07 arc(6.23,14.76) 6.35,14.46 6.36,14.45 arc(6.6,14.29) 6.88,14.23 J1.B6 9.09,14.23 arc(9.48,14.16) 9.81,13.94 10.62,13.12 arc(10.95,12.9) 11.34,12.83 D4.C 12.08,12.48 arc(12.15,12.3) 12.34,12.22 15.15,12.22 arc(15.32,12.29) 15.39,12.46 R11.1
USB_RENUMN: length 14.3
  TOP w0.203: U2.38 26.32,17.23 arc(26.16,17.27) 26.03,17.35 v1(25.88,17.5) ; v1(25.88,15.95) 20.26,15.95 arc(19.87,15.87) 19.54,15.65 19.05,15.16 arc(18.83,14.83) 18.75,14.44 R9.2
  BOTTOM w0.203: v1(25.88,17.5) v1(25.88,15.95)
N01383: length 1.7
  TOP w0.203: R14.2 15.39,11.15 arc(15.34,10.93) 15.22,10.74 15.09,10.62 arc(14.95,10.4) 14.9,10.15 Q1.2
N01643: length 7.8
  TOP w0.203: R7.2 R12.1 16.59,8.89 arc(16.74,8.95) 16.8,9.1 Q1.1 16.8,10.92 arc(16.95,11.28) 17.31,11.43 R9.1
N02559: length 3.4
  TOP w0.203: U1.1 16.94,18.72 17.17,18.49 17.17,17.04 16.97,16.84 U1.3
N02991: length 2.1
  TOP w0.305: C7.1 U1.4
N15750: length 2.4
  TOP w0.203: R16.1 C11.2 R15.2
N18913: length 2
  TOP w0.305: D8.A R30.2
N18917: length 2
  TOP w0.305: D9.C R36.2
N43468: length 6.6
  TOP w0.203: J8.8 51.91,18.81 arc(51.7,18.85) 51.53,18.97 51.5,19 arc(51.33,19.11) 51.12,19.15 R32.2
N43472: length 6.7
  TOP w0.203: R33.2 50.78,16.81 arc(51.11,16.75) 51.4,16.56 51.43,16.53 arc(51.71,16.34) 52.05,16.27 J8.6
N43480: length 6.6
  TOP w0.203: J8.2 47.09,11.19 arc(46.95,11.16) 46.83,11.08 46.81,11.05 arc(46.69,10.98) 46.55,10.95 R39.2
N43828: length 7.1
  TOP w0.203: J8.4 51.51,12.53 arc(51.18,12.31) 50.79,12.23 R37.2
N44493: length 5.2
  TOP w0.203: R19.1 30.79,24.65 arc(30.87,25.04) 31.09,25.37 J4.5
N44516: length 4.1
  TOP w0.203: R18.1 28.58,26.92 28.57,26.92 J4.3
N44659: length 13.7
  TOP w0.203: R35.2 v1(47.09,14.55) ; J9.1 48.06,6.99 arc(47.37,7.27) 47.09,7.95 v1(47.09,10.01)
  BOTTOM w0.203: v1(47.09,14.55) v1(47.09,10.01)
N44671: length 15.9
  TOP w0.203: J9.2 54.17,8.06 arc(53.84,8.28) 53.45,8.36 50.48,8.36 arc(50.1,8.43) 49.77,8.65 v1(48.41,10.01) ; R38.2 v1(48.41,15.67)
  BOTTOM w0.203: v1(48.41,10.01) v1(48.41,15.67)
N60144: length 10.1
  TOP w0.203: R34.1 50.25,13.39 arc(50.64,13.46) 50.97,13.68 51.91,14.63 arc(52.24,14.85) 52.63,14.93 53.48,14.93 arc(53.87,15) 54.2,15.22 J8.5
N60172: length 9.6
  TOP w0.203: R31.1 50.91,17.98 arc(51.14,17.94) 51.33,17.81 51.35,17.78 arc(51.54,17.66) 51.77,17.61 53.63,17.61 arc(54.02,17.69) 54.35,17.91 J8.7
N62729: length 5.1
  TOP w0.203: J1.A5 11.3,16.23 arc(11.52,16.19) 11.7,16.07 11.73,16.04 arc(11.91,15.92) 12.13,15.88 R4.2
N62849: length 5.8
  TOP w0.203: J1.B5 8.72,13.23 arc(9.11,13.16) 9.44,12.94 10.93,11.45 arc(11.26,11.23) 11.65,11.15 R5.2
N105457: length 4.3
  TOP w0.203: J4.1 24.93,26.51 arc(25.15,26.18) 25.23,25.79 R17.1
N112115: length 6.6
  TOP w0.203: U2.2 29.36,9.71 arc(29.24,9.44) 28.97,9.32 27.57,9.32 arc(27.18,9.24) 26.85,9.02 26.38,8.55 arc(26.05,8.33) 25.66,8.26 R13.2
N115138: length 17.6
  TOP w0.203: R40.2 v1(22.77,14.23) R1.1
  BOTTOM w0.203: J2.2 17.14,20.28 arc(17.22,19.89) 17.44,19.57 v1(22.77,14.23)
N116586: length 1.7
  TOP w0.305: R6.2 D5.A
N120825: length 1.6
  TOP w0.203: R27.2 D6.A
N121032: length 1.6
  TOP w0.203: R28.2 D7.A

## Copper pours and planes (outline as drawn; the poured copper is in the pictures)
3V3_ST on TOP (solid shape): 21.29,23.47 21.29,19.58 21.16,19.46 21.16,18.57 20.95,18.36 18.57,18.36 18.47,18.47 18.47,19.05 18.62,19.2 18.95,19.2 19.33,19.58 19.33,22.43 20.5,23.6 21.16,23.6
GND on TOP: 0.6,27 1.3,28.7 3,29.4 57,29.4 58.7,28.7 59.4,27 59.4,3 58.7,1.3 57,0.6 3,0.6 1.3,1.3 0.6,3 ; 12 cut-outs
GND on BOTTOM: 0.6,27 1.3,28.7 3,29.4 57,29.4 58.7,28.7 59.4,27 59.4,3 58.7,1.3 57,0.6 3,0.6 1.3,1.3 0.6,3 ; 4 cut-outs
U5V on TOP (solid shape): 12.45,20.45 12.45,20.07 11.94,19.56 11.94,17.27 11.81,17.14 6.86,17.14 6.86,17.63 9.25,17.63 10.92,19.3 10.92,20.45 11.05,20.57 12.32,20.57
N02559 on TOP (solid shape): 16.76,23.52 16.76,18.52 16.64,18.39 15.82,18.39 14.48,19.74 13.44,19.74 13.28,19.89 13.28,20.65 13.46,20.83 14.4,20.83 15.6,22.02 15.6,23.47 15.77,23.65 16.64,23.65

## Text on the board
Ref Des/Silkscreen Top: RST | SWO | RX | TX | DIO | TCK | GND | VCC | U5V | 3V3 | BOOT0 | SCL | SDA | EXT11 | PB5 | IN9 | PB4 | IN4 | IN1 | JTDO | MCO | JTDI | EN | Hero | ST-LINK-V2
DISPLAY_TOP: 30 | 24 | R3 | 60 | 54
PLACE_BOUND_TOP: FIGURE | FINISHED_SIZE | 11.81 | 41.34 | 43.31 | 55.12 | 25.59 | 66.93x23.62 | DRILL CHART: TOP to BOTTOM | ALL UNITS ARE IN MILS | PLATED | NON-PLATED | QTY | 199 | 13 | 25 | 4 | 2
